# EAGLE board THE OMEGA (EAGLE 9.7.0)

Size 153.05 x 108.95 mm. Coordinates in mm from the lower left corner, seen from the top.
Outline: 0,0 153.05,0 153.05,108.95 0,108.95 0,0
Copper layers (1*16): Top 0.035mm / dielectric 1.5mm / Bottom 0.035mm
Design rules "default": minimum track width 6mil, minimum drill 0.35mm, track to track 6mil, track to pad 6mil, pad to pad 6mil, via to via 6mil, smd to smd 6mil, copper to edge 40mil, drill to drill 6mil, minimum pad ring 10mil, minimum via ring 8mil, stop-mask expansion 4mil, vias tented up to drill 0mil, thermal gap 10mil

## Footprints (pad centres in the part's own frame; a part is rotated, then mirrored left to right if it is on the bottom)
LEDRD254W60D565H860B = drill 0.981 pad 1.581: 1 -1.27,0; 2 1.27,0
LEDRD254W60D565H860B_G = drill 0.981 pad 1.581: 1 -1.27,0; 2 1.27,0
LEDRD254W60D565H860B_Y = drill 0.981 pad 1.581: 1 -1.27,0; 2 1.27,0
PIEZO = drill 1 pad 1.6: 1 -3.5,0; 2 3.5,0
RESAD1016W63L850D250B = drill 0.83 pad 1.43: 1 -5.08,0; 2 5.08,0
SWITCH-MOMENTARY-PTH-6.5MM = drill 1.016 pad 1.88: 1 -3.251,2.261; 2 3.251,2.261; 3 -3.251,-2.261; 4 3.251,-2.261
SWITCH-SPDT-PTH-8.5X3.7MM = drill 1.016 pad 1.88: 1 -2.54,0; 2 0,0; 3 2.54,0
SG90 = drill 1.016 long: 1 -2.54,0; 2 0,0; 3 2.54,0
ARDUINO-UNO-R3-SHIELD = drill 1.016 pad 1.88: 3.3V 24.13,-2.54; 5V 24.13,0; A0 24.13,12.7; A1 24.13,15.24; A2 24.13,17.78; A3 24.13,20.32; A4 24.13,22.86; A5 24.13,25.4; AREF -24.13,-13.97; D2 -24.13,20.32; D3 -24.13,17.78; D4 -24.13,15.24; D5 -24.13,12.7; D6 -24.13,10.16; D7 -24.13,7.62; D8 -24.13,3.81; D9 -24.13,1.27; D10 -24.13,-1.27; D11 -24.13,-3.81; D12 -24.13,-6.35; D13 -24.13,-8.89; GND@0 24.13,2.54; GND@1 24.13,5.08; GND@2 -24.13,-11.43; IOREF 24.13,-7.62; NC 24.13,-10.16; RES 24.13,-5.08; RX -24.13,25.4; SCL -24.13,-19.05; SDA -24.13,-16.51; TX -24.13,22.86; VIN 24.13,7.62

## Placement (x,y rotation side)
D1  RED  [LEDRD254W60D565H860B]  40.52,9.72 180 top
D2  GREEN  [LEDRD254W60D565H860B_G]  62.52,9.99 180 top
DUVC_LED_STANDIN  YELLOW  [LEDRD254W60D565H860B_Y]  55.63,101.04 180 top
PIEZO1  PIEZO  [PIEZO]  141.32,65.44 0 top
R1  100  [RESAD1016W63L850D250B]  62.93,93.67 90 top
R3  100  [RESAD1016W63L850D250B]  48.86,8.97 90 top
R4  100  [RESAD1016W63L850D250B]  71.62,14.68 90 top
S1  SWITCH_MOMENTARY  [SWITCH-MOMENTARY-PTH-6.5MM]  88.91,93.97 90 top
S3  TOGGLE  [SWITCH-SPDT-PTH-8.5X3.7MM]  124.3,87.68 0 top
SERVO1  SERVOSG90  [SG90]  7.06,26.35 0 top
SERVO2  SERVOSG90  [SG90]  103.79,24.82 0 top
U1  ARDUINO-UNO-R3-SHIELD  [ARDUINO-UNO-R3-SHIELD]  56.43,58.59 270 top

## Library data of the parts
D1 = Tinkercad; CATEGORY: Opto-Electronic; SUB-CATEGORY: LED; VALUE: LED_RED
D2 = Tinkercad; CATEGORY: Opto-Electronic; SUB-CATEGORY: LED; VALUE: LED_GREEN
DUVC_LED_STANDIN = Tinkercad; CATEGORY: Opto-Electronic; SUB-CATEGORY: LED; VALUE: LED_YELLOW
PIEZO1 R1 R3 R4 S1 S3 SERVO1 SERVO2 U1 = Tinkercad

## Nets
D1_A: D1.1 R3.1
D2_A: D2.1 R4.1
DUVC_LED_STANDIN_A: DUVC_LED_STANDIN.1 R1.2
U1_5V: SERVO1.2 SERVO2.2 U1.5V
U1_D3: SERVO2.3 U1.D3
U1_D5: SERVO1.3 U1.D5
U1_D6: R4.2 U1.D6
U1_D8: S1.2 U1.D8
U1_D9: R3.2 U1.D9
U1_D10: S3.2 U1.D10
U1_D11: R1.1 U1.D11
U1_D13: PIEZO1.1 U1.D13
U1_GND: D1.2 D2.2 DUVC_LED_STANDIN.2 PIEZO1.2 S1.3 S3.3 SERVO1.1 SERVO2.1 U1.GND@0 U1.GND@1 U1.GND@2

## Tracks (layer width: path | path; a pad name or v marks a point on that pad's centre or on a via)
D1_A  (1 unrouted)
D2_A  (1 unrouted)
DUVC_LED_STANDIN_A  (1 unrouted)
U1_5V  (2 unrouted)
U1_D3  (1 unrouted)
U1_D5  (1 unrouted)
U1_D6  (1 unrouted)
U1_D8  (1 unrouted)
U1_D9  (1 unrouted)
U1_D10  (1 unrouted)
U1_D11  (1 unrouted)
U1_D13  (1 unrouted)
U1_GND  (10 unrouted)